# EAGLE board GPS_radiologger_v10 (EAGLE 9.5.1)
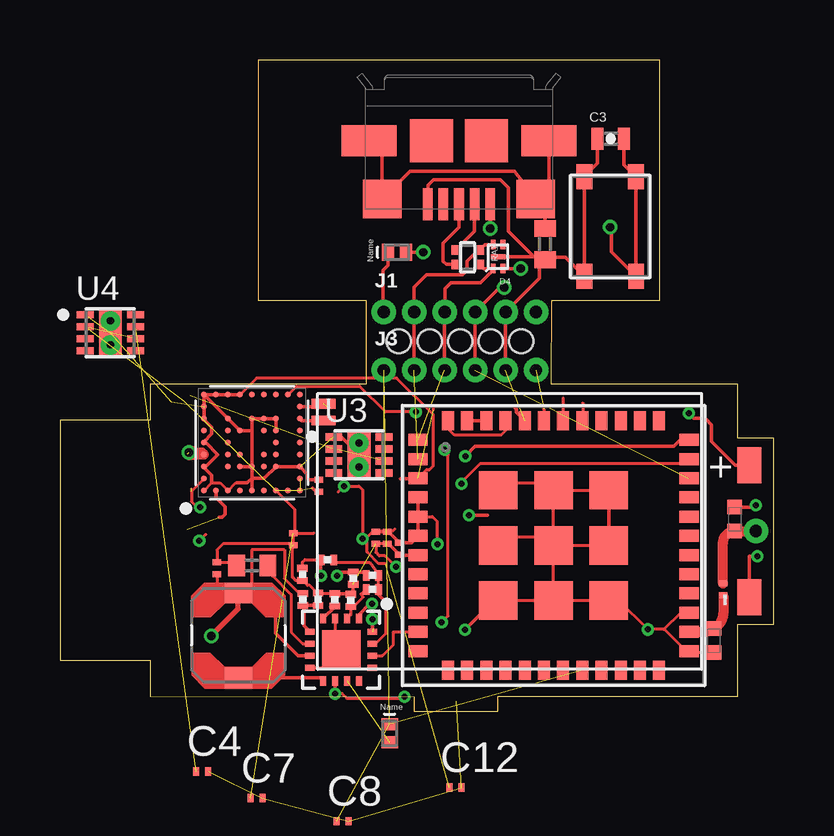
[diagram p0: board, top side]
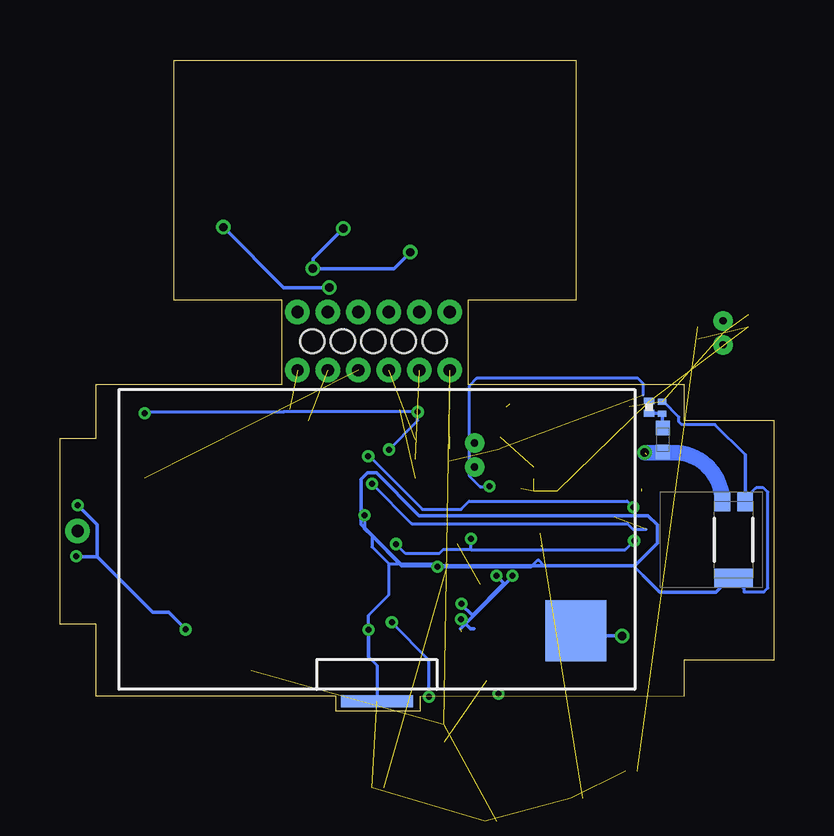
[diagram p1: board, bottom side, seen from below]

Size 29.75 x 27.13 mm. Coordinates in mm from the lower left corner, seen from the top.
Outline: 3.75,0.63 14.75,0.6 14.75,0 18.25,0 18.25,0.63 28.25,0.63 28.25,3.63 29.75,3.63 29.75,11.38 28.25,11.38 28.25,13.63 20.5,13.63 20.5,17.13 25,17.13 25,27.13 8.25,27.13 8.25,17.13 12.75,17.13 12.75,13.63 3.75,13.63 3.75,12.13 0,12.13 0,2.13 3.75,2.13 3.75,0.63
Copper layers (1*16): Top 0.035mm / dielectric 0.33mm / Bottom 0.035mm
Design rules "default *": minimum track width 5mil, minimum drill 0.25mm, track to track 5mil, track to pad 5mil, pad to pad 5mil, via to via 5mil, smd to smd 5mil, copper to edge 5mil, drill to drill 3mil, minimum pad ring 10mil, minimum via ring 5mil, stop-mask expansion 4mil, vias tented up to drill 0mil, thermal gap 10mil
Net classes: 1 vcc: width 0 mm
Holes 1 mm at 14.12,15.41 15.42,15.41 16.69,15.41 17.96,15.41 19.23,15.41

## Footprints (pad centres in the part's own frame; a part is rotated, then mirrored left to right if it is on the bottom)
C0201 = smd 0.25 x 0.35: 1 -0.25,0; 2 0.25,0
0402-CAP = smd 0.5 x 0.9: 1 -0.55,0; 2 0.55,0
C0402 = smd 0.7 x 0.9: 1 -0.65,0; 2 0.65,0
CDSQR4148-HF = smd 0.7 x 0.5: P$1 0,0.375; P$2 0,-0.375
USBULC6-2N4 = smd 0.2 x 0.4: P$1 0.2,0.5; P$2 -0.2,0.5; P$3 -0.2,-0.5; P$4 0.2,-0.5 | smd 0.6 x 0.2: P$5 0,0
0402-TIGHT = smd 0.6 x 0.6: 1 -0.5,0; 2 0.5,0
1X06_1.27MM = drill 0.508 pad 1: 1 0,0; 2 1.27,0; 3 2.54,0; 4 3.81,0; 5 5.08,0; 6 6.35,0
1X01_SMALL = drill 0.508: P$1 0,0
1981584-1 = smd 0.4 x 1.35: 1 -1.3,4.1; 2 -0.65,4.1; 3 0,4.1; 4 0.65,4.1; 5 1.3,4.1 | smd 1.8 x 1.8: M1 -1.15,1.45; M2 1.15,1.45 | smd 2.3 x 1.3: S1 -3.75,1.45; S2 3.75,1.45 | smd 1.6 x 1.6: S3 -3.2,3.885; S4 3.2,3.885
0402 = smd 0.7 x 0.9: 1 -0.65,0; 2 0.65,0
IND_LPS4012-103MRB = smd 0.87 x 1.15: 1 -1.765,0; 2 1.765,0
R0201 = smd 0.28 x 0.43: 1 -0.255,0; 2 0.255,0
EXB24V = smd 0.4 x 0.36: P$1 -0.3,0.5; P$2 0.3,0.5; P$3 -0.3,-0.5; P$4 0.3,-0.5
TYPEABZ = smd 0.8 x 0.5: P$1 -5.65,4.4; P$2 -5.65,3.6; P$3 -5.65,2.8; P$4 -5.65,2; P$5 -5.65,1.2; P$6 -5.65,0.4; P$7 -5.65,-0.4; P$8 -5.65,-1.2; P$9 -5.65,-2; P$10 -5.65,-2.8; P$11 -5.65,-3.6; P$12 -5.65,-4.4; P$25 5.65,-4.4; P$26 5.65,-3.6; P$27 5.65,-2.8; P$28 5.65,-2; P$29 5.65,-1.2; P$30 5.65,-0.4; P$31 5.65,0.4; P$32 5.65,1.2; P$33 5.65,2; P$34 5.65,2.8; P$35 5.65,3.6; P$36 5.65,4.4 | smd 0.5 x 0.8: P$13 -4.4,-5.2; P$14 -3.6,-5.2; P$15 -2.8,-5.2; P$16 -2,-5.2; P$17 -1.2,-5.2; P$18 -0.4,-5.2; P$19 0.4,-5.2; P$20 1.2,-5.2; P$21 2,-5.2; P$22 2.8,-5.2; P$23 3.6,-5.2; P$24 4.4,-5.2; P$37 4.4,5.2; P$38 3.6,5.2; P$39 2.8,5.2; P$40 2,5.2; P$41 1.2,5.2; P$42 0.4,5.2; P$43 -0.4,5.2; P$44 -1.2,5.2; P$45 -2,5.2; P$46 -2.8,5.2; P$47 -3.6,5.2; P$48 -4.4,5.2 | smd 1.6 x 1.6: P$49 -2.3,2.3; P$50 0,2.3; P$51 2.3,2.3; P$52 -2.3,0; P$53 0,0; P$54 2.3,0; P$55 -2.3,-2.3; P$56 0,-2.3; P$57 2.3,-2.3
UBLOX_ZOE_M8-0-10 = smd 0.25 x 0.25: 1 -1.996,2.004; 2 -1.496,2.004; 3 -0.996,2.004; 4 -0.496,2.004; 5 0.004,2.004; 6 0.504,2.004; 7 1.004,2.004; 8 1.504,2.004; 9 2.004,2.004; 10 2.004,1.504; 11 2.004,1.004; 12 2.004,0.504; 13 2.004,0.004; 14 2.004,-0.496; 15 2.004,-0.996; 16 2.004,-1.496; 17 2.004,-1.996; 18 1.504,-1.996; 19 1.004,-1.996; 20 0.504,-1.996; 21 0.004,-1.996; 22 -0.496,-1.996; 23 -0.996,-1.996; 24 -1.496,-1.996; 25 -1.996,-1.996; 26 -1.996,-1.496; 27 -1.996,-0.996; 28 -1.996,-0.496; 29 -1.996,0.004; 30 -1.996,0.504; 31 -1.996,1.004; 32 -1.996,1.504; 33 -0.996,1.004; 34 -0.496,1.004; 35 0.004,1.004; 36 0.504,1.004; 37 1.004,1.004; 38 1.004,0.004; 39 1.004,-0.496; 40 1.004,-0.996; 41 0.504,-0.996; 42 0.004,-0.996; 43 -0.496,-0.996; 44 -0.996,-0.996; 45 -0.996,-0.496; 46 -0.996,0.004; 47 -0.996,0.504; 48 -0.496,0.504; 49 0.504,0.504; 50 0.504,-0.496; 51 -0.496,-0.496
MICROCHIP_MCP1810T-33I-J8A_0 = smd 0.7 x 0.3: 1 -1.05,0.75; 2 -1.05,0.25; 3 -1.05,-0.25; 4 -1.05,-0.75; 5 1.05,-0.75; 6 1.05,-0.25; 7 1.05,0.25; 8 1.05,0.75 | smd 0.95 x 1.95: 9 0,0 | drill 0.3 pad 0.6: PAD_1 0,0.5; PAD_2 0,-0.5
GMB301016 = smd 1.5 x 1: + -2.75,10; - 2.75,10
LFCSP-16-3X3 = smd 0.4 x 0.25: 1 -1.3,0.75; 2 -1.3,0.25; 3 -1.3,-0.25; 4 -1.3,-0.75; 9 1.3,-0.75; 10 1.3,-0.25; 11 1.3,0.25; 12 1.3,0.75 | smd 0.25 x 0.4: 5 -0.75,-1.3; 6 -0.25,-1.3; 7 0.25,-1.3; 8 0.75,-1.3; 13 0.75,1.3; 14 0.25,1.3; 15 -0.25,1.3; 16 -0.75,1.3 | smd 1.6 x 1.6: EXP 0,0
ICARUS_FULL = smd 2.54 x 2.54: P$1 -3.81,-8.29 | smd 0.5 x 3: P$2 -6.75,0
C&KTACTILESWITCH = smd 1.05 x 0.65: P$1 -2.075,1.073; P$2 2.075,1.075; P$3 -2.075,-1.075; P$4 2.075,-1.075
CRYSTAL-SMD-1.0X1.2MM = smd 0.4 x 1: P$1 0.35,0; P$2 -0.35,0
W3011 = smd 0.8 x 0.65: 1 1.6,0.475; 2 1.6,-0.475 | smd 0.8 x 1.6: 3 -1.6,0

## Placement (x,y rotation side)
C1  47 pF  [C0201]  4.64,12.63 90 bottom
C2  10 uF  [C0201]  14.15,6.77 90 top
C3  100 nF  [0402-CAP]  22.97,23.84 0 top
C4  4.7 uF  [C0201]  5.93,-2.52 0 top
C5  4.7 uF  [C0201]  9.72,7.16 270 top
C6  0.1 uF  [C0201]  10.8,9.38 90 top
C7  10 uF  [C0201]  8.19,-3.63 0 top  (outside the outline)
C8  4.7 uF  [C0201]  11.77,-4.59 0 top  (outside the outline)
C9  1 uF  [C0201]  13.65,7.23 90 top
C10  0.1 uF  [C0201]  13.17,7.23 90 top
C11  0.1 uF  [C0201]  27.64,5.07 270 top
C12  10 uF  [C0201]  16.5,-3.19 0 top  (outside the outline)
C14  4.7uF  [C0201]  6.55,5.96 90 top
C15  10uF  [C0402]  8.01,6.07 180 top
D1  CDSQR4148-HF  [CDSQR4148-HF]  14.05,19.12 90 top
D2  CDSQR4148-HF  [CDSQR4148-HF]  13.75,-0.93 0 top
D4  USBULC6-2N4  [USBULC6-2N4]  18.27,18.93 180 top
FB1  FERRITE_BEAD-120_OHM_TIGHT  [0402-TIGHT]  4.61,11.3 90 bottom
J1  [1X06_1.27MM]  13.5,16.63 0 top
J2  [1X01_SMALL]  29.01,7.5 0 top
J3  [1X06_1.27MM]  13.5,14.2 0 top
J4  1981584-1  [1981584-1]  16.63,25.21 180 top
L1  BLM15HB121SN1  [0402]  20.22,19.46 270 top
L3  FERRITE_BEAD-120_OHM_TIGHT  [0402-TIGHT]  27.26,2.93 270 top
L4  FERRITE_BEAD-120_OHM_TIGHT  [0402-TIGHT]  28.13,7.99 90 top
L5  22 uH  [IND_LPS4012-103MRB]  7.43,3.15 270 top
R1  10  [R0201]  5.18,12.66 90 bottom
R2  6.34M  [R0201]  10.12,4.65 90 top
R3  14.7M  [R0201]  10.76,4.66 270 top
R4  20k  [R0201]  11.46,4.63 270 top
RA1  EXB24V  [EXB24V]  16.99,18.9 270 top
RPG1  6.8M  [R0201]  11.16,6.3 0 top
RPG2  3.3M  [R0201]  10.11,5.69 90 top
RSD1  6.49M  [R0201]  13.03,5.65 0 top
RSD2  3.48M  [R0201]  12.23,5.54 90 top
RTERM1  4.32M  [R0201]  13.03,5.07 0 top
RTERM2  5.62M  [R0201]  12.12,4.61 270 top
U1  TYPEABZ  [TYPEABZ]  20.58,6.9 0 top
U2  UBLOX_ZOE_M8-0-10  [UBLOX_ZOE_M8-0-10]  8,11.17 90 top
U3  MICROCHIP_MCP1810T-33I-J8AMICROCHIP_MCP1810T-33I-J8A_0_0  [MICROCHIP_MCP1810T-33I-J8A_0]  12.46,10.67 0 top
U4  MICROCHIP_MCP1810T-33I-J8AMICROCHIP_MCP1810T-33I-J8A_0_0  [MICROCHIP_MCP1810T-33I-J8A_0]  2.1,15.75 0 top
U$1  GMB301016  [GMB301016]  18.75,7.49 270 top
U$3  ADP5090  [LFCSP-16-3X3]  11.72,2.56 270 top
U$4  ICARUS_FULL  [ICARUS_FULL]  16.53,7.15 90 bottom
U$6  C&KTACTILESWITCH  [C&KTACTILESWITCH]  22.94,20.19 270 top
Y1  32.768kHz  [CRYSTAL-SMD-1.0X1.2MM]  10.99,12.45 270 top
Y2  W3011  [W3011]  1.66,7.13 90 bottom

## Library data of the parts
C1 C2 C4-C12 C14 = rcl; SPICEPREFIX: C
C3 = SparkFun-Capacitors
C15 R2-R4 RPG1 RPG2 RSD2 RTERM2 = resistor
D1 D2 D4 RA1 U1 U$6 = Kris
FB1 L3 L4 = SparkFun-Coils
J1-J3 = SparkFun-Connectors
J4 = con-usb; MF: Hirose; MPN: ZX62-AB-5PA(11)
L1 = inductors
L5 = LPS4012-103MRB; AVAILABILITY: Unavailable; DESCRIPTION: Power inductor, shielded, 20/30% tol, SMT, RoHS, lead-free, halogen-free; MF: Coilcraft; MP: LPS4012-103MRB; PACKAGE: None; PRICE: None
R1 RSD1 RTERM1 = rcl; SPICEPREFIX: R
U2 = SparkFun-GPS; PROD_ID: IC-14251
U3 U4 = MCP1810; CENTROID_NOT_SPECIFIED: No; DATASHEET: http://ww1.microchip.com/downloads/en/DeviceDoc/20005623A.pdf; DIGIKEY_DESCRIPTION: IC REG LINEAR 150MA 8-VDFN; DIGIKEY_PART_NUMBER: MCP1810T-33I/J8ACT-ND; IPC_LAND_PATTERN_NAME: DFN200X200X85-8; LEAD_FREE: yes; MF: Microchip; MFG_PACKAGE_IDENT: C04-3207A; MOUSER_PART_NUMBER: 579-MCP1810T-33I/J8A; MPN: MCP1810T-33I/J8A; PACKAGE: VDFN8; PREFIX: U; ROHS: yes; TEMPERATURE_RANGE_HIGH: +85°C; TEMPERATURE_RANGE_LOW: -40°C
U$1 = Powerstream
U$3 = ADP5090_LFCSP-16-3X3
U$4 = TrisolX_Solar_Cells
Y1 = SparkFun-Clocks; XTAL: SC12S-7PF20PPM
Y2 = SparkFun-GPS; PROD_ID: ANT-14304

## Nets
!INT: U2.43
!RESET: U2.20
!SAFEBOOT: U2.34
A0: U1.P$22
ANT: C11.1 J2.P$1 L4.1
BAT: U2.16 U$1.+ U$3.10
BOOT: J3.6 U1.P$43
D0: U1.P$18
D1: U1.P$19
D_SEL: U2.48
DCDC_OUT: D2.P$2 U$3.11
DIS_SW: U1.P$11 U$3.14
DM: J3.2 U1.P$2
DM1: D4.P$4 J1.2 RA1.P$1
DP: J3.3 U1.P$1
DP1: D4.P$1 J1.3 RA1.P$2
GND: C1.2 C2.1 C3.1 C4.2 C5.2 C6.2 C7.2 C8.2 C9.1 C10.1 C12.2 C14.2 C15.2 D4.P$5 J1.5 J3.5 J4.5 L1.2 L3.2 L4.2 R3.1 R4.1 RPG2.1 RSD2.1 RTERM2.1 U1.P$3 U1.P$7 U1.P$25 U1.P$27 U1.P$44 U1.P$49 U1.P$50 U1.P$51 U1.P$52 U1.P$53 U1.P$54 U1.P$55 U1.P$56 U1.P$57 U2.1 U2.3 U2.5 U2.7 U2.8 U2.9 U2.10 U2.11 U2.12 U2.17 U2.23 U2.29 U2.31 U2.37 U2.38 U2.39 U2.40 U2.41 U2.44 U2.46 U2.47 U2.49 U3.1 U3.9 U4.1 U4.9 U$1.- U$4.P$2 U$6.P$3 U$6.P$4 Y2.2 Y2.3
GPS_ANT: FB1.1 U2.4 Y2.1
GPS_EN: U4.8
GPS_PWR: C5.1 C6.1 C7.1 R1.2 U2.24 U2.25 U2.27 U4.2 U4.6
MCU_PWR: C2.2 C9.2 C10.2 C12.1 U1.P$4 U1.P$5 U1.P$6 U3.2 U3.6
N$1: U1.P$45 U1.P$48
N$2: D1.P$1 J1.1
N$5: L5.2 U$3.9
N$6: U$3.3 U$3.8 U$3.EXP
N$7: R2.1 R3.2 U$3.5
N$8: C15.1 U$3.6
N$9: C1.1 FB1.2 R1.1
N$10: R4.2 U$3.4
N$11: RTERM1.1 RTERM2.2 U$3.2
N$12: RPG1.1 RPG2.2 U$3.16
N$14: U2.18 Y1.P$2
N$15: U2.19 Y1.P$1
N$16: RSD1.1 RSD2.2 U$3.1
N$17: RPG1.2 RSD1.2 RTERM1.2 U$3.15
N$22: C4.1 U4.7
N$31: J4.3 RA1.P$4
N$32: C11.2 L3.1 U1.P$26
N$33: J4.2 RA1.P$3
PGOOD: U$3.13
RESET: C3.2 J1.4 U$6.P$1 U$6.P$2
RST: J3.4 U1.P$34
RXI/MOSI: U2.22
SCL: U1.P$35 U2.32
SDA: U1.P$36 U2.2
SWDCLK: U1.P$42
SWDIO: U1.P$41
TCXO_OUT: U1.P$46 U1.P$47
TIMEPULSE: U2.33
TXO/MISO: U2.21
USB_SHIELD: J4.S1 J4.S2 J4.S3 J4.S4 L1.1
V_DCDC_OUT: U2.26
VBUS: C8.1 D2.P$1 J3.1 U1.P$20 U3.7 U3.8
VBUS1: D1.P$2 D4.P$2 J4.1
VIN: C14.1 L5.1 R2.2 U$3.7 U$4.P$1
VREF+: U1.P$32

## Tracks (layer width: path | path; a pad name or v marks a point on that pad's centre or on a via)
ANT
  Top 0.152: L4.1
  Top 0.406: C11.1 27.64,7 arc-90 L4.1 | L4.1 J2.P$1
BAT  (via drill 0.25)
  Top 0.127: v11.48,0.71 11.49,0.73 11.76,0.73 11.96,0.53 14.26,0.53 14.34,0.6 v14.36,0.6 | v15.92,3.69 v15.92,3.7 16.18,3.97 16.18,10.66 16.04,10.81 v16.04,10.89 | U2.16 9.85,13.53 12.49,13.53 13.57,12.46 v14.83,12.46
  Top 0.152: U$1.+ 28.16,10.24 27.17,11.24 27.17,11.92 26.9,12.19 26.43,12.19 v26.21,12.41 | v11.48,0.71 v11.47,0.72 U$3.10
  Bottom 0.127: v26.21,12.41 26.17,12.45 20.43,12.45 20.42,12.46 v14.83,12.46 14.83,12.1 v16.04,10.89 | v14.36,0.6 14.36,2.12 15.92,3.68 v15.92,3.69
BOOT  (1 unrouted)
  Top 0.127: 20.18,12.57 U1.P$43
DCDC_OUT  (1 unrouted)
DIS_SW
  Top 0.127: U$3.14 13.44,2.31 13.9,2.77 13.9,3.3 U1.P$11
DM  (1 unrouted)
  Top 0.152: U1.P$2 14.82,10.39
DM1
  Top 0.152: D4.P$4 17.72,19.43 RA1.P$1 17.3,19.01 17.23,19.01 16.97,18.75 16.97,18.35 16.79,18.18 15.29,18.18 14.77,17.66 J1.2 14.77,14.19 14.76,14.19
DP  (1 unrouted)
DP1
  Top 0.152: RA1.P$2 17.67,18.43 D4.P$1 18.07,18.38 17.53,17.85 16.31,17.85 16.06,17.6 J1.3 16.04,14.14 16.03,14.14
GND  (via drill 0.25)  (12 unrouted)
  Top 0.127: R3.1 10.74,4.91 10.42,5.23 10.32,5.23 RPG2.1 9.82,5.44 9.69,5.57 9.69,6.83 9.7,6.85 9.57,6.98 9.15,6.98 | C15.2 7.22,6.21 C14.2 6.55,6.71 6.81,6.98 9.15,6.98 | U1.P$56 U1.P$57 23.31,4.6 v24.51,3.4 | U1.P$56 U1.P$55 18.07,4.6 | U1.P$56 U1.P$53 | U1.P$53 U1.P$50 | U1.P$50 U1.P$51 | U1.P$50 20.29,9.49 18.1,9.49 18.1,9.37 U1.P$49 | U1.P$53 20.23,7.24 18.19,7.24 18.19,6.99 U1.P$52 | U1.P$53 U1.P$54 | U1.P$3 15.29,10.06 15.41,10.06 15.56,10.21 15.56,12.35 14.04,13.87 8.2,13.87 U2.12 | 15.56,12.55 15.56,12.7 | U1.P$27 25.88,4.1 25.18,3.4 v24.51,3.4 | 9.15,6.98 | L3.2 26.29,2.43 U1.P$25 26.11,2.5 25.21,3.4 v24.51,3.4 | U2.1 6.33,9.51 6.33,9.54 6.37,9.51 6.67,9.51 U2.31 7.33,9.51 7.37,9.51 | C9.1 C10.1 13.17,6.61 13.31,6.47 13.55,6.47 v14.01,6.01 | R4.1 10.74,4.89
  Top 0.152: 8,11.73 U2.38 U2.39 U2.40 U2.41 | 8,11.73 U2.46 | U2.46 U2.47 | 8,11.73 7.95,11.68 U2.49 U2.37 U2.9 | U2.46 8,9.7 | 8,9.7 U2.29 | 8,9.7 8.52,9.7 U2.44 U2.23 10.33,9.85 10.33,9.7 10.4,9.63 C6.2 | 8,9.7 7.81,9.51 7.37,9.51 | U2.9 U2.10 U2.12 | U2.9 U2.8 U2.7 6,12.14 6.33,11.81 6.33,11.54 6,11.21 U2.5 6.08,11.18 6.58,10.68 6.08,10.18 U2.3 6,10.14 6.33,9.81 6.33,9.54 | C5.2 9.72,7.33 9.69,7.36 | 10.74,4.89 R3.1 | R4.1 12.11,4.89 RTERM2.1 12.23,4.97 RSD2.1 | 18.07,4.6 18.07,4.58 v16.88,3.39 | U1.P$52 18.16,7.01 | U1.P$51 U1.P$54 | U1.P$3 14.9,9.67 14.2,9.67 | C9.1 13.69,6.97 C2.1 14.17,6.5 U1.P$7 | U1.P$44 19.03,12.44 19.03,12.58 18.91,12.7 15.56,12.7 | 17.83,8.15 v17.05,8.15 | 9.69,6.83 9.69,6.86 | U$1.- 28.75,6.45 v29.07,6.45 | v29.01,8.57 29.01,8.49 L4.2 | 15.33,20.58 J4.5 15.33,21.9 15.57,22.14 18.37,22.14 18.7,21.81 18.7,20 19.07,19.62 19.08,19.62 19.77,18.93 20.2,18.93 L1.2 | L1.2 20.3,18.91 | 20.3,18.91 21.07,18.91 U$6.P$4 U$6.P$3 22.41,22.81 C3.1 | L1.2 19.99,18.91 19.99,18.04 J1.5 J3.5 | D4.P$5 18.99,18.93 18.99,18.94 20.27,18.94 20.3,18.91 | U3.1 11.71,11.42 U3.9
  Bottom 0.127: U$4.P$2 16.54,1.9 16.88,2.26 | v16.88,3.39 16.88,3.99 16.04,4.84 16.04,6.13 | v17.05,8.15 17.05,7.6 | 16.75,7.3 16.75,6.84 16.04,6.13 | 16.04,6.13 13.89,6.13 | v14.01,6.01 10.11,6.01 9.84,6.27 9.79,6.27 9.58,6.06 5.84,6.06 5.42,5.64 | 1.19,10.68 2.44,11.93 3.83,11.93 3.94,12.05 3.94,12.24 4.57,12.88 C1.2 | Y2.3 1.23,5.1 1.23,4.97 0.4,4.97 0.24,5.13 0.24,9.12 0.42,9.3 0.74,9.3 1.19,8.85 Y2.2
  Bottom 0.152: v16.88,3.39 16.88,2.26 | Y2.3 1.82,5.53 2.4,4.95 4.74,4.95 5.42,5.64 | Y2.2 1.19,10.68 | v14.01,6.01 13.89,6.13 | v29.07,6.45 29.04,6.43 28.2,6.43 | 17.05,7.6 16.75,7.3 15.5,6.05 15.47,6.05 | 15.47,6.05 5.79,6.05 4.85,6.98 4.85,7.76 5.23,8.14 14.77,8.14 16.56,9.92 16.94,9.92 17.2,9.66 17.2,7.78 15.47,6.05 | 28.2,6.43 25.89,4.11 25.22,4.11 v24.51,3.4 | v29.01,8.57 28.2,7.77 28.2,6.43
GPS_ANT  (via drill 0.35)  (1 unrouted)
  Top 0.127: U2.4
  Top 0.406: U2.4 5.91,10.77 v5.37,10.77
  Bottom 0.127: 4.61,10.69 5.3,10.69
  Bottom 0.152: FB1.1 4.61,10.69
  Bottom 0.65: Y2.1 arc-90 4.17,10.77 v5.37,10.77
GPS_PWR  (7 unrouted)
  Top 0.127: U2.27 9.77,8.41 9.77,7.46 C5.1 10.59,7.41
  Top 0.152: C6.1 10.69,9.13 10.54,9.28
MCU_PWR  (via drill 0.25)  (3 unrouted)
  Top 0.127: 6.08,7.36 v5.81,7.1 | U1.P$5 15.53,8.1 15.74,7.89 v15.74,6.96 | 13.96,7.59 13.89,7.52 13.17,7.52 C10.2 13.03,7.48 12.8,7.25 12.8,6.63 13.29,6.14 13.56,6.14 | 11.59,9.13 v11.84,9.37 12.46,9.37 12.61,9.22 v12.61,7.18
  Top 0.152: U1.P$4 U1.P$5 U1.P$6 14.65,7.02 C2.2 13.69,7.47 C9.2 C10.2
  Bottom 0.127: v15.74,6.96 15.34,6.56 13.94,6.56 13.78,6.72 12.61,6.72 | 5.43,13.16 5.43,13.64 5.65,13.86 12.38,13.86 12.7,13.54 12.7,9.81 12.24,9.35 11.85,9.35 v11.84,9.37 | v5.81,7.1 6.19,6.72 12.61,6.72 | v12.61,7.18 12.61,6.72
N$1
  Top 0.127: U1.P$48 16.26,12.01 16.26,11.68 16.45,11.49 18.39,11.49 18.58,11.68 U1.P$45
N$2
  Top 0.152: D1.P$1 13.67,18.56 13.46,18.35 13.46,16.66 J1.1
N$5
  Top 0.152: U$3.9 10.97,1.39 L5.2
N$6
  Top 0.127: U$3.3 11.47,2.56 | U$3.8 11.72,1.81
  Top 0.152: 11.47,2.56 U$3.EXP 11.72,1.81
N$7
  Top 0.152: U$3.5 10.17,3.56 10.17,4.39 R2.1 10.13,4.4 R3.2
N$8
  Top 0.127: 8.86,5.77 8.86,5.63 9.64,4.85 9.64,3.29 10.12,2.81 U$3.6
  Top 0.152: 8.86,5.77 C15.1
N$9
  Bottom 0.152: FB1.2 4.64,11.83 C1.1 4.67,12.4 R1.1
N$10
  Top 0.127: U$3.4 11.14,4.03
  Top 0.152: 11.27,4.34 11.31,4.38 R4.2 11.46,4.35 U$3.4
N$11
  Top 0.127: U$3.2 12.12,4.01 RTERM2.2 12.26,4.36 12.64,4.74 12.55,4.87 12.75,5.07 RTERM1.1
N$12  (via drill 0.25)  (1 unrouted)
  Top 0.127: RPG2.2 10.11,6.21 10.21,6.31 10.21,6.3 RPG1.1
  Top 0.152: RPG1.1 10.86,6.28 10.86,5.61 v10.88,5.64 | v13.02,3.83 | v13.02,3.83 U$3.16
  Bottom 0.152: v10.88,5.64 10.88,5.6 13.05,3.43 | v13.02,3.83 12.63,3.43 12.5,3.43
N$14  (1 unrouted)
  Top 0.152: 11.13,12.68 U2.18
N$15
  Top 0.152: Y1.P$1 10.08,12.1 U2.19
N$16  (via drill 0.25)
  Top 0.152: U$3.1 12.47,4.02 12.92,4.46 v13,4.46 | RSD1.1 12.64,5.79 RSD2.2 11.71,5.79 v11.55,5.63
  Bottom 0.152: v13,4.46 13,4.43 12.56,3.99 11.23,5.32 v11.55,5.63
N$17
  Top 0.127: 13.59,3.24 13.16,2.81 U$3.15 | RPG1.2 11.54,6.17 12.92,6.17 13.28,5.68 RSD1.2 RTERM1.2
  Top 0.152: 13.59,3.24 13.59,4.53 13.28,4.84 RTERM1.2
N$19
  Top 0.152: 6.05,10.56 5.38,10.51
N$20
  Top 0.152: 6.04,10.8 5.43,11.01
N$22  (1 unrouted)
N$31
  Top 0.152: J4.3 16.63,20.15 15.98,19.5 15.98,18.74 16.11,18.61 RA1.P$4
N$32
  Top 0.127: C11.2 27.66,4.76 | L3.1 27.13,3.3 U1.P$26
  Top 0.406: U1.P$26 26.83,3.3 arc90 27.66,4.12 27.66,4.76
N$33
  Top 0.152: J4.2 17.28,20 RA1.P$3
RESET  (via drill 0.35)
  Top 0.152: v22.94,20.16 22.99,20.11 22.99,19.14 U$6.P$2 24.01,22.15 23.98,22.23 U$6.P$1 23.52,22.76 C3.2 | v18.52,17.64 18.33,17.64 J1.4 17.31,14.16 17.3,14.16
  Bottom 0.152: v22.94,20.16 20.42,17.64 v18.52,17.64
RST  (1 unrouted)
SCL  (via drill 0.25)  (1 unrouted)
  Top 0.127: U1.P$35 26.04,10.31 17.52,10.31 16.75,9.54 v16.75,9.47
  Top 0.152: 6.64,8.08 6.76,8.08 6.88,8.19 6.88,8.51 6.5,8.89 U2.32
  Bottom 0.127: v16.75,9.47 15.09,7.81 6.09,7.81 5.86,7.57 5.31,7.57
SDA  (via drill 0.25)  (1 unrouted)
  Top 0.127: 5.78,8.42 v5.85,8.49 | 5.48,9.26 5.48,8.72 5.78,8.42 | 5.78,8.42 5.9,8.3 | U2.2 5.48,9.16
  Top 0.152: U1.P$36 25.86,11.3 25.6,11.03 17.31,11.03 v16.9,10.62
  Bottom 0.127: v16.9,10.62 16.85,10.62 14.64,8.41 13.03,8.41 12.69,8.74 6.1,8.74 v5.85,8.49
SWDCLK
  Top 0.127: 20.98,13.04 U1.P$42
SWDIO
  Top 0.127: 21.8,12.84 21.8,12.12
  Top 0.152: 21.8,12.12 U1.P$41
TCXO_OUT
  Top 0.152: U1.P$47 U1.P$46
USB_SHIELD
  Top 0.152: J4.S2 13.43,23.21 J4.S4 14.6,22.49 18.95,22.49 19.85,21.34 | J4.S1 20.38,21.47 19.85,20.94 19.85,21.34 | 19.85,21.34 J4.S3 | J4.S3 19.28,21.88 | J4.S3 20.22,20.94 L1.1
VBUS  (5 unrouted)
VBUS1  (via drill 0.35)
  Top 0.152: D4.P$2 | v19.2,18.43 D4.P$2 | J4.1 17.96,20.23 v17.93,20.11 | v15.14,19.12 D1.P$2
  Bottom 0.152: v15.14,19.12 15.82,18.43 v19.2,18.43 19.2,18.84 v17.93,20.11
VIN  (via drill 0.35)
  Top 0.127: L5.1 6.55,4.92 C14.1 | 8.05,4.92 7.99,4.98 7.99,6.71 9.36,6.71 9.36,5.51 9.97,4.9 R2.2
  Top 0.152: L5.1 8.05,4.92 8.7,4.92 9.01,4.61 9,4.6 9,3.24 9.93,2.31 U$3.7
  Top 0.2: v6.3,3.13 7.43,4.26 L5.1
  Bottom 0.152: U$4.P$1 8.03,3.13 v6.3,3.13